# Altium PCB LED_TwoBars.PcbDoc
Units mm, origin at the board's own origin, x right, y up, seen from the top; angles counter-clockwise.
Board outline 152.4 x 101.6 mm, 2 copper layers (Top Layer, Bottom Layer); 31 components, 51 nets, 142 pads, 11 vias.
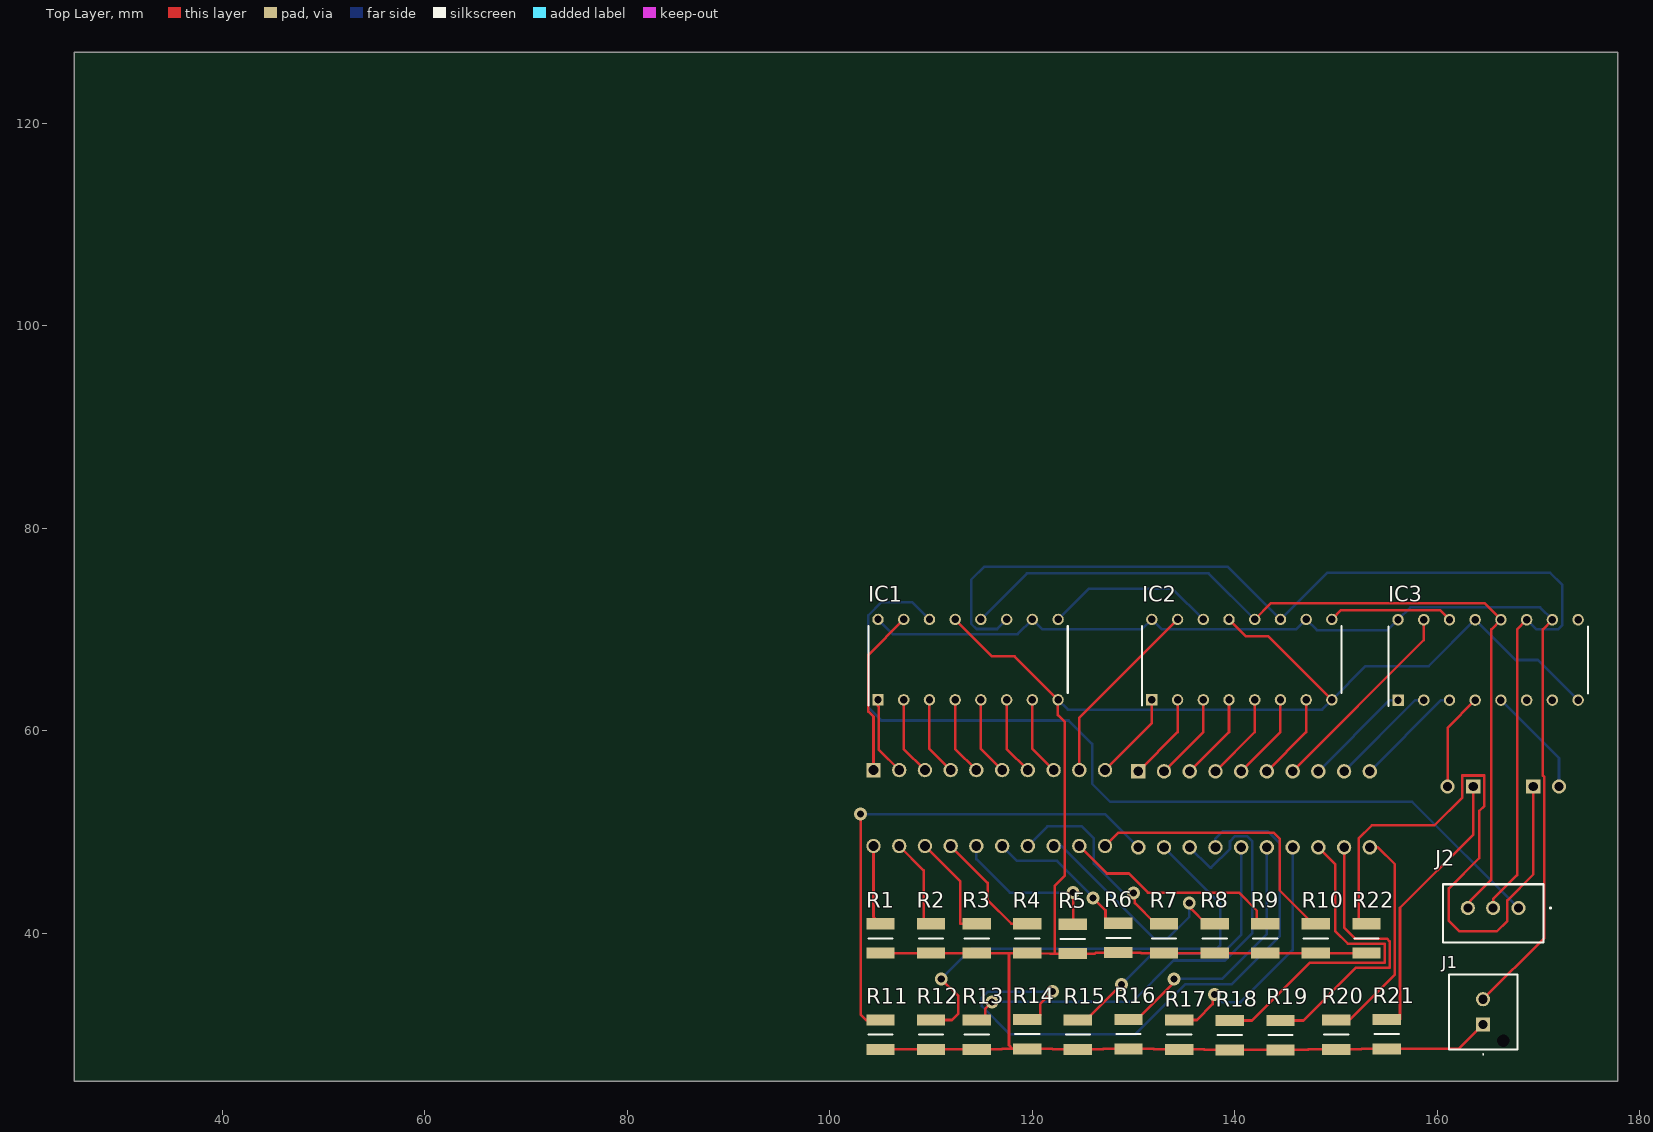
[diagram p0: Top Layer view]
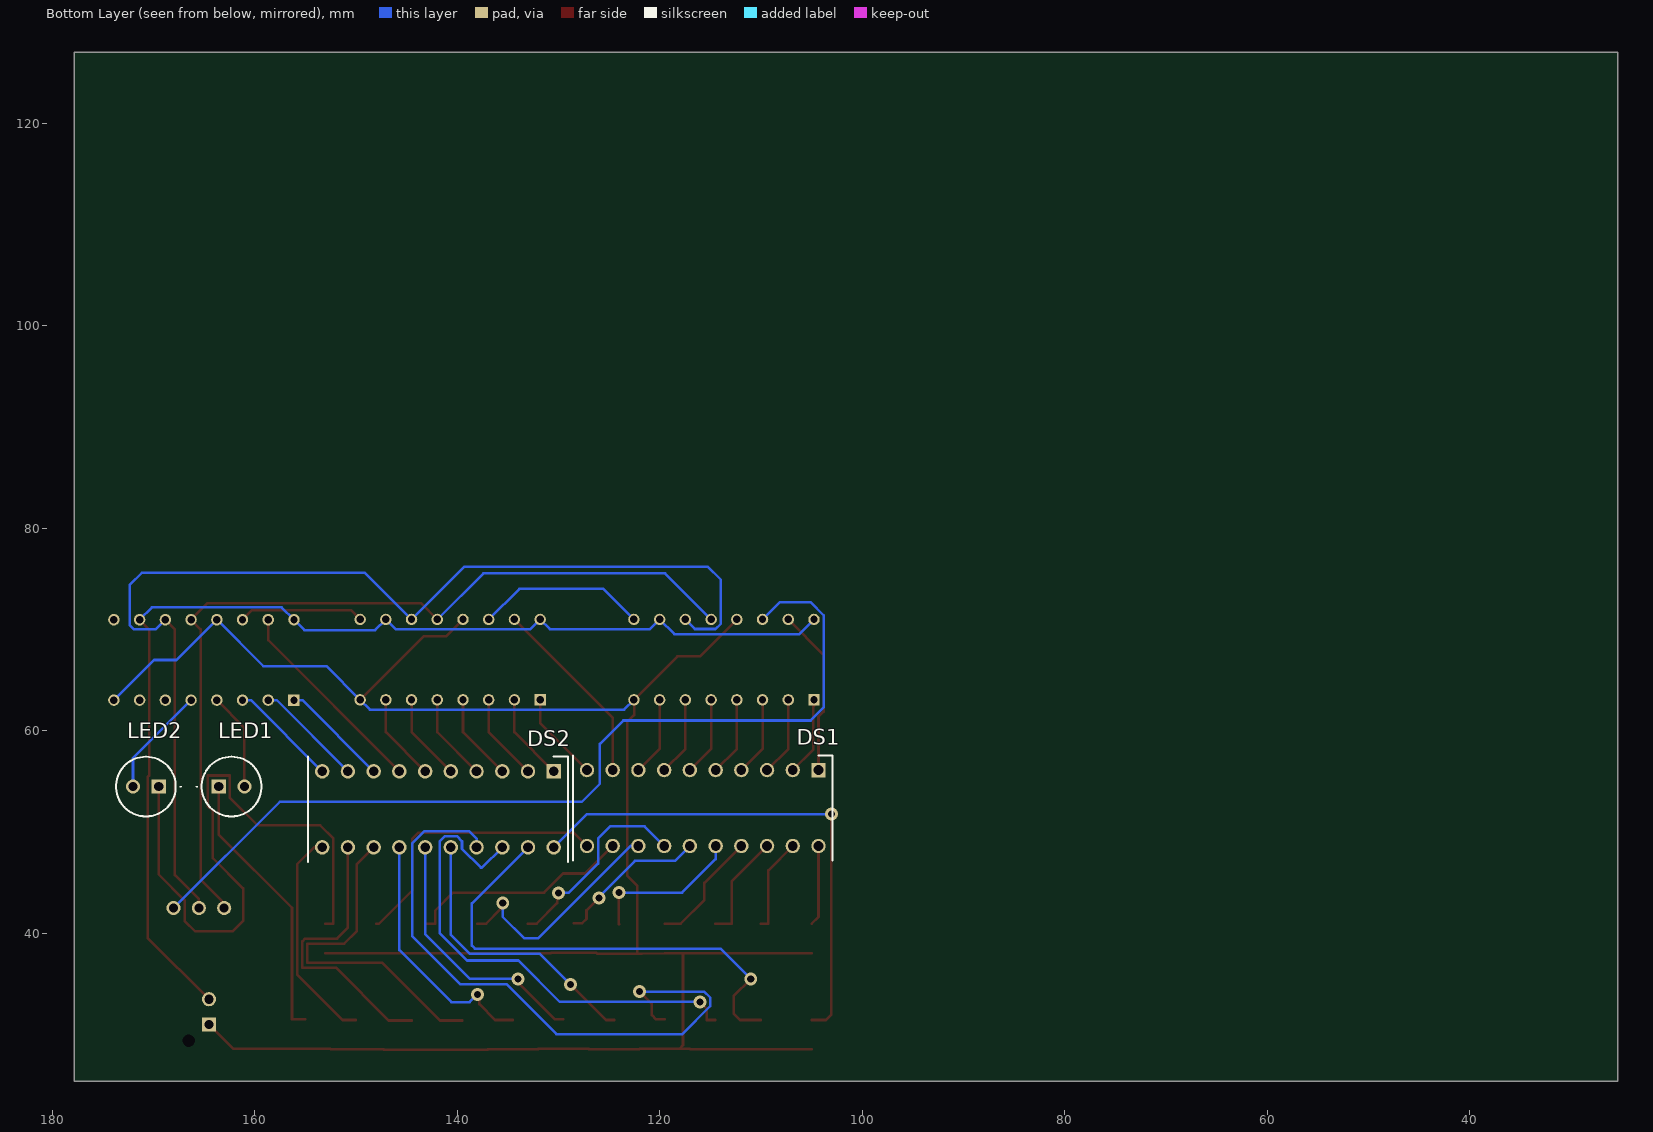
[diagram p1: Bottom Layer view, seen from below]
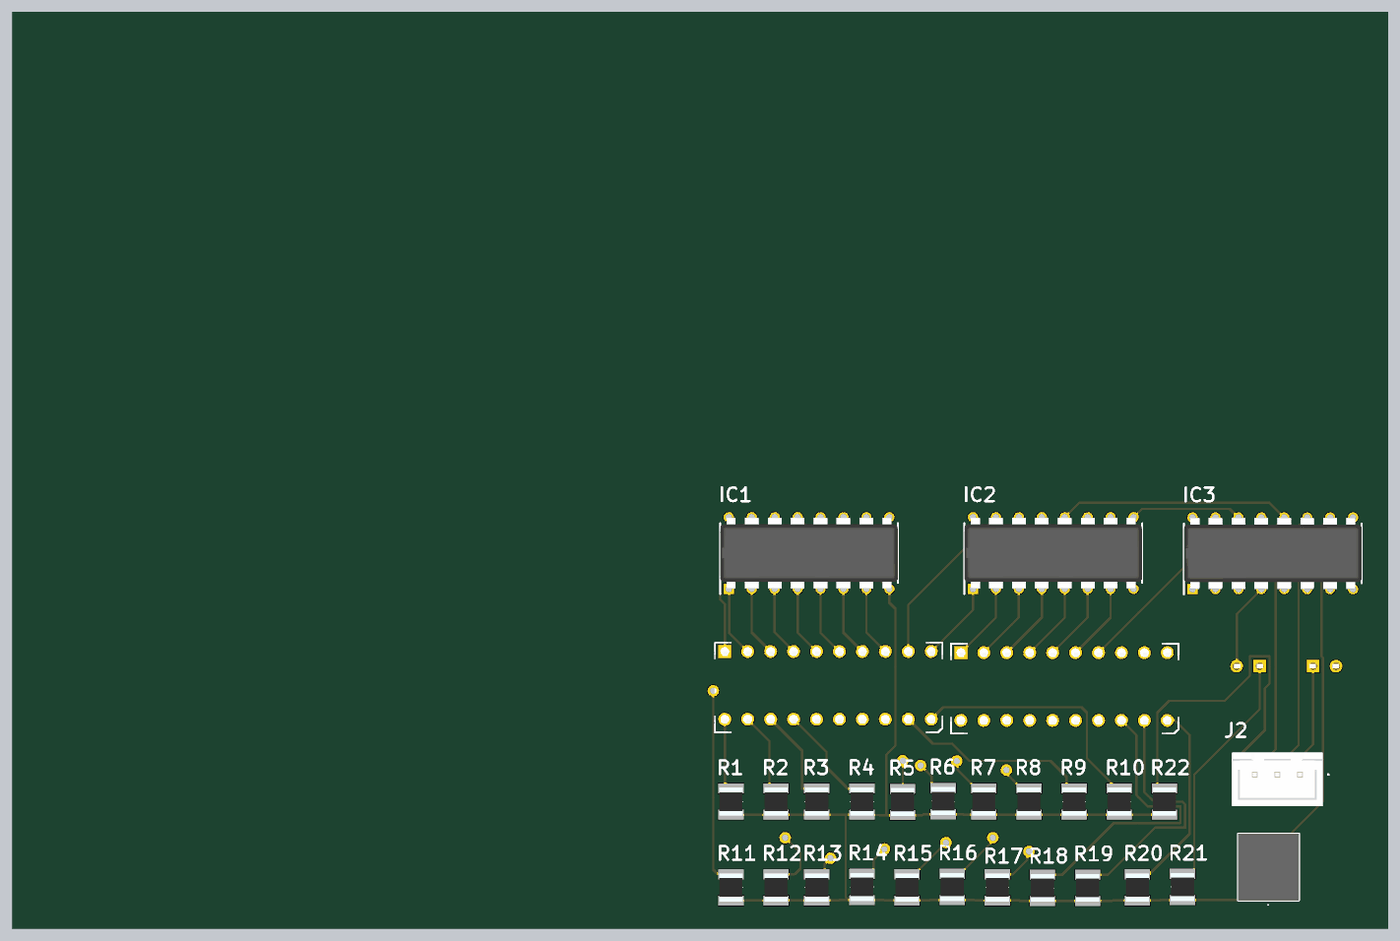
[diagram p2: 3D render of the assembled board from above, using the file's embedded part models]
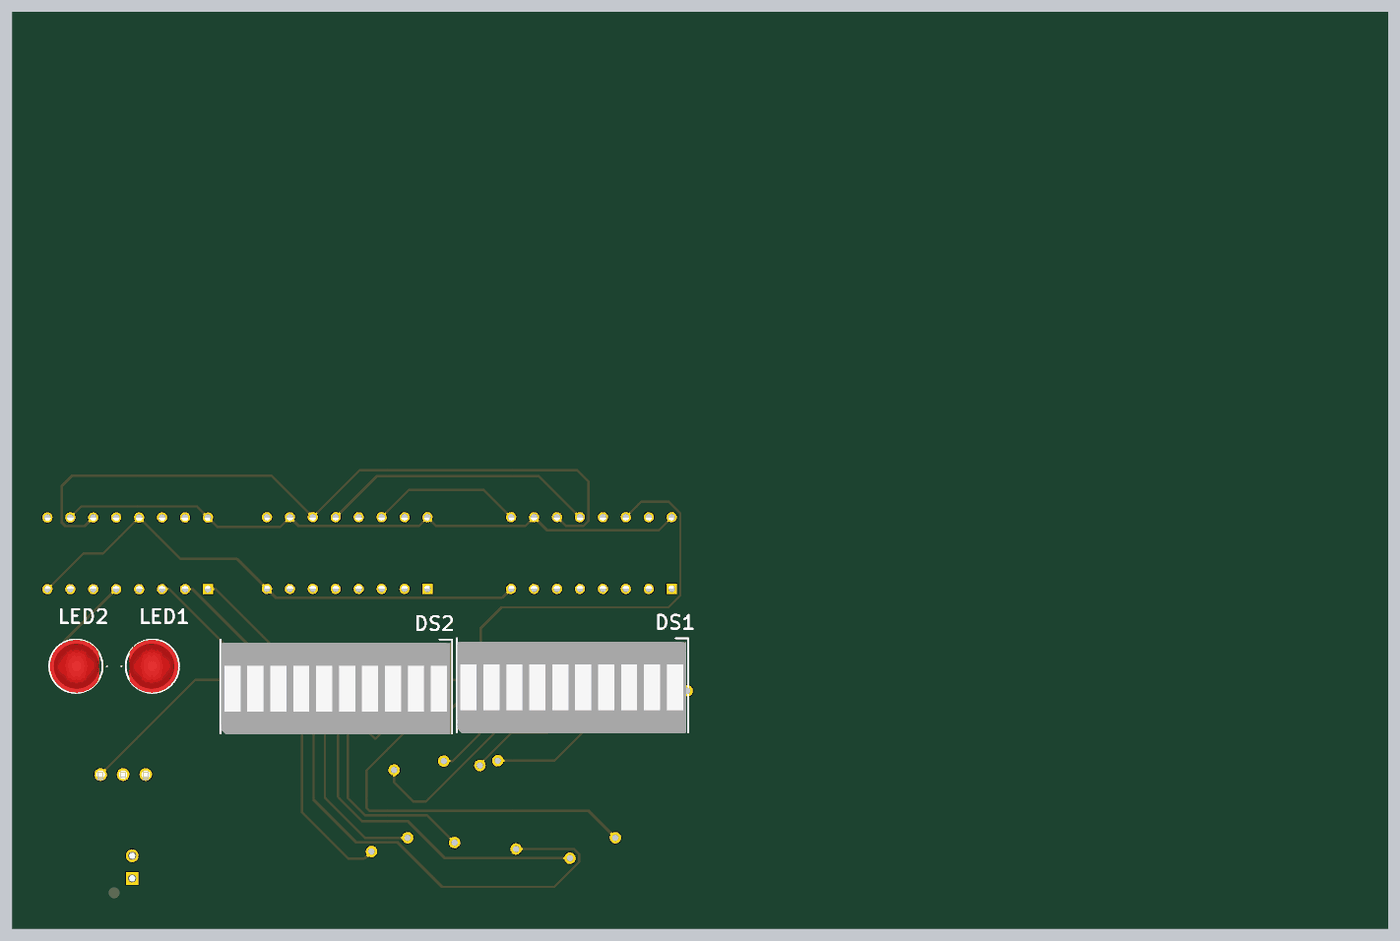
[diagram p3: 3D render of the assembled board from below, using the file's embedded part models]

## Layer stack, top to bottom
Top Solder: solder mask 0.0102, Solder Resist, Dk 3.5
Top Layer: signal copper 0.0356
Dielectric 1: dielectric 0.32, FR-4, Dk 4.8
Bottom Layer: signal copper 0.0356
Bottom Solder: solder mask 0.0102, Solder Resist, Dk 3.5

## Board outline
25.4,25.4 177.8,25.4 177.8,127 25.4,127

## Design rules (kind name [scope] priority, off if disabled: settings)
Clearance [All] p1: gap=0.254 ignorepadtopadclearanceinfootprint=FALSE
PolygonConnect [All] p1: connectstyle=Relief reliefconductorwidth=0.254 reliefentries=4 polygonreliefangle="90 Angle" airgapwidth=0.254
RoutingVias [All] p1: holewidth=0.711 width=1.27 viastyle="Through Hole" minholewidth=0.711 minwidth=1.27 maxholewidth=0.711 maxwidth=1.27
SolderMaskExpansion [All] p1: expansion=0.102 istentingtop=FALSE
SupplyNets "Schematic Supply Nets_1" [InNet('+5')] p1: voltage=0.000
SupplyNets "Schematic Supply Nets" [InNet('GND')] p2: voltage=0.000
Width [All] p1: maxlimit=0.254 minlimit=0.254 preferedwidth=0.254
30 further rules are at their usual default settings.

## Components (designator, comment, footprint, x,y, rotation, side; value= is the part's Value field where it differs from the comment)
DS1 "DC10GWA" DIPS750W75P254L2540H825Q20N 104.317,56.128 r270 bottom
DS2 "DC10GWA" DIPS750W75P254L2540H825Q20N 130.46,56 r270 bottom
IC1 "SN74HC595N" DIP794W53P254L1930H508Q16N 113.65,67.03 r90 top
IC2 "SN74HC595N" DIP794W53P254L1930H508Q16N 140.69,67.03 r90 top
IC3 "SN74HC595N" DIP794W53P254L1930H508Q16N 165,67 r90 top
J1 "BH2B-XH-2_LF__SN_" BH2BXH2LFSN 164.5,31 r270 top
J2 "B3B-XH-A_LF__SN_" B3BXHALFSN 168,42.5 r180 top
LED1 "WP7113ID5V" WP7113ID5V 163.54,54.5 r90 bottom
LED2 "WP7113ID5V" WP7113ID5V 169.46,54.5 r270 bottom
R1 "330" RESC3126X65N 105,39.5 r270 top
R2 "RC1210FR-07330RL" RESC3126X65N 110,39.5 r270 top
R3 "330" RESC3126X65N 114.5,39.5 r270 top
R4 "RC1210FR-07330RL" RESC3126X65N 119.5,39.5 r270 top
R5 "330" RESC3126X65N 124,39.45 r270 top
R6 "RC1210FR-07330RL" RESC3126X65N 128.5,39.55 r270 top
R7 "330" RESC3126X65N 133,39.5 r270 top
R8 "RC1210FR-07330RL" RESC3126X65N 138,39.5 r270 top
R9 "330" RESC3126X65N 143,39.5 r270 top
R10 "330" RESC3126X65N 148,39.5 r270 top
R11 "330" RESC3126X65N 105,30 r270 top
R12 "330" RESC3126X65N 110,30 r270 top
R13 "330" RESC3126X65N 114.5,30 r270 top
R14 "330" RESC3126X65N 119.5,30.05 r270 top
R15 "330" RESC3126X65N 124.5,30 r270 top
R16 "330" RESC3126X65N 129.5,30.05 r270 top
R17 "330" RESC3126X65N 134.5,30 r270 top
R18 "330" RESC3126X65N 139.5,29.95 r270 top
R19 "RC1210FR-07330RL" RESC3126X65N 144.5,29.95 r270 top
R20 "330" RESC3126X65N 150,30 r270 top
R21 "330" RESC3126X65N 155,30.05 r270 top
R22 "330" RESC3126X65N 153,39.5 r270 top

## Footprints (in the part's own frame and the unit in brackets; to place one, negate y for a bottom-side part, rotate by r counter-clockwise, add the part's x,y. Pads: shape width x height; smd on the part's side, far side on the other; paste and mask are expansions set on the pad)
B3BXHALFSN [mm]
  round 1.4 hole 0.9: 1(0,0) 2(2.5,0) 3(5,0)
  silkscreen extent -3.2,-2.35 7.45,3.4, body extent -2.45,-2.35 7.45,3.4, height 7.09
BH2BXH2LFSN [mm]
  rect 1.4x1.4 hole 0.9: 1(0,0)
  round 1.4 hole 0.9: 2(-2.5,0)
  round 0.6 hole 1.2 unplated: MH1(1.6,2)
  silkscreen extent -4.95,-3.35 3,3.4, body extent -4.95,-3.35 2.45,3.4, height 14.3
DIP794W53P254L1930H508Q16N [mm]
  rect 1.13x1.13 hole 0.73: 1(-3.97,8.89)
  round 1.13 hole 0.73: 2(-3.97,6.35) 3(-3.97,3.81) 4(-3.97,1.27) 5(-3.97,-1.27) 6(-3.97,-3.81) 7(-3.97,-6.35) 8(-3.97,-8.89) 9(3.97,-8.89) 10(3.97,-6.35) 11(3.97,-3.81) 12(3.97,-1.27) 13(3.97,1.27) 14(3.97,3.81) 15(3.97,6.35) 16(3.97,8.89)
  silkscreen extent -4.53,-9.84 3.3,9.84, body extent -3.94,-9.84 3.94,9.84, height 5.24
DIPS750W75P254L2540H825Q20N [mm]
  rect 1.425x1.425 hole 0.95: 1(0,0)
  round 1.425 hole 0.95: 2(0,-2.54) 3(0,-5.08) 4(0,-7.62) 5(0,-10.16) 6(0,-12.7) 7(0,-15.24) 8(0,-17.78) 9(0,-20.32) 10(0,-22.86) 11(7.5,-22.86) 12(7.5,-20.32) 13(7.5,-17.78) 14(7.5,-15.24) 15(7.5,-12.7) 16(7.5,-10.16) 17(7.5,-7.62) 18(7.5,-5.08) 19(7.5,-2.54) 20(7.5,0)
  silkscreen extent -1.46,-24.26 8.95,1.4, body extent -1.1,-24.21 9.06,1.19, height 6.29
RESC3126X65N [mm]
  rect 1.1x2.8 smd: 1(-1.45,0) 2(1.45,0)
  silkscreen extent 0,-1.2 0,1.2, body extent -1.55,-1.3 1.55,1.3, height 0.65
WP7113ID5V [mm]
  rect 1.4x1.4 hole 0.9: 1(0,0)
  round 1.4 hole 0.9: 2(0,-2.54)
  silkscreen extent -2.95,-4.22 2.95,2.2, body extent -2.95,-4.15 2.95,1.28, height 15.17

## Part data
DS1 DS2: "Display", Manufacturer_Name=Kingbright, Mouser Part Number=604-DC10GWA, Datasheet Link=http://www.us.kingbright.com/images/catalog/SPEC/DC10GWA.pdf, Height=8.25mm, Manufacturer_Part_Number=DC10GWA, Mouser Price/Stock=https://www.mouser.co.uk/ProductDetail/Kingbright/DC10GWA?qs=E09Sz5t5voWFSEBebdyzXA%3D%3D
IC1 IC2 IC3: "Integrated Circuit", Manufacturer_Name="Texas Instruments", Mouser Part Number=595-SN74HC595N, Arrow Part Number=SN74HC595N, Arrow Price/Stock=https://www.arrow.com/en/products/sn74hc595n/texas-instruments?utm_currency=USD&region=nac, Datasheet Link=http://www.ti.com/lit/ds/symlink/sn74hc595.pdf, Height=5.08mm, Manufacturer_Part_Number=SN74HC595N, Mouser Price/Stock=https://www.mouser.co.uk/ProductDetail/Texas-Instruments/SN74HC595N?qs=IEl3ej0IqwBTHkYa8XPoMQ%3D%3D
J1: "Connector", Arrow Part Number=BH2B-XH-2(LF)(SN), Manufacturer_Name="JST (JAPAN SOLDERLESS TERMINALS)", Arrow Price/Stock=https://www.arrow.com/en/products/bh2b-xh-2-lf-sn/jst-manufacturing?region=europe, Datasheet Link=https://www.jst-mfg.com/product/pdf/eng/eXH-H.pdf, Height=14.2mm, Manufacturer_Part_Number=BH2B-XH-2(LF)(SN)
J2: "Connector", Arrow Part Number=B3B-XH-A(LF)(SN), Manufacturer_Name="JST (JAPAN SOLDERLESS TERMINALS)", Mouser Part Number=306-B3BXHALFSNP, Arrow Price/Stock=https://www.arrow.com/en/products/b3b-xh-a-lf-sn/jst-manufacturing?utm_currency=USD&region=europe, Datasheet Link=https://datasheet.lcsc.com/szlcsc/1812131720_JST-Sales-America-B3B-XH-A-LF-SN_C144394.pdf, Height=7mm, Manufacturer_Part_Number=B3B-XH-A(LF)(SN), Mouser Price/Stock=https://www.mouser.co.uk/ProductDetail/JST-Commercial/B3B-XH-ALFSN?qs=cdbOS8ANM9BVkoboCCIEMQ%3D%3D
LED1 LED2: "LED", Manufacturer_Name=Kingbright, Mouser Part Number=604-WP7113ID5V, Arrow Part Number=WP7113ID5V, Arrow Price/Stock=https://www.arrow.com/en/products/wp7113id5v/kingbright?utm_currency=USD&region=nac, Datasheet Link=https://www.kingbrightusa.com/images/catalog/SPEC/WP7113ID5V.pdf, Height=9.85mm, Manufacturer_Part_Number=WP7113ID5V, Mouser Price/Stock=https://www.mouser.co.uk/ProductDetail/Kingbright/WP7113ID5V?qs=58z0TXQGVSQgkIxR0kd%2F5Q%3D%3D
R1 R3 R5 R7 R9 R10 R11 R12 R13 R14 R15 R16 R17 R18 R20 R21 R22: library part RC1210FR-07330RL, "Resistor", Manufacturer_Name="Yageo Group", Datasheet Link=https://www.yageogroup.com/content/datasheet/asset/file/PYU-RC_GROUP_51_ROHS_L, Height=0.65mm, Manufacturer_Part_Number=RC1210FR-07330RL
R2 R4 R6 R8 R19: "Resistor", Manufacturer_Name="Yageo Group", Datasheet Link=https://www.yageogroup.com/content/datasheet/asset/file/PYU-RC_GROUP_51_ROHS_L, Height=0.65mm, Manufacturer_Part_Number=RC1210FR-07330RL

## Via types
v1: diameter 1.27, hole 0.711, Top Layer to Bottom Layer, 11 vias

## Nets (pads, with @x,y where several pads share a name; then routed paths per layer and width w, separated by ;. In a path a pad name is that pad's centre, name@x,y a point inside that pad or via, vN(x,y) a via of type N, cw(c..) or ccw(c..) an arc to the next point about the centre after c; other vN are vias at no path point)
+5: IC1.10 IC1.16 IC2.10 IC2.16 IC3.10 IC3.16 J1.2 | length 111.7
  Top Layer w0.254: J1.2 170.556,39.556 170.556,55.435 170.403,55.587 170.403,70.023 IC3.10
  Bottom Layer w0.254: IC1.16 106.214,69.546 118.546,69.546 IC1.10 120.96,70.04 130.84,70.04 IC2.16 132.76,70.04 146.08,70.04 IC2.10 148.102,69.938 155.078,69.938 IC3.16 157.329,72.189 170.131,72.189 IC3.10
GND: IC1.8 IC1.13 IC2.8 IC2.13 IC3.8 IC3.13 J1.1 R1.2 R2.2 R3.2 R4.2 R5.2 R6.2 R7.2 R8.2 R9.2 R10.2 R11.2 R12.2 R13.2 R14.2 R15.2 R16.2 R17.2 R18.2 R19.2 R20.2 R21.2 R22.2 | length 229.7
  Top Layer w0.254: R11.2 R12.2 R13.2 116.962,28.55 117.012,28.6 118.054,28.6 ; R1.2 R2.2 R3.2 117.724,38.05 ; IC1.13 116.033,67.347 118.253,67.347 IC1.8 122.524,63.06 122.524,61.556 123.21,60.87 123.21,45.706 122.194,44.69 122.194,38 ; IC2.13 141.066,69.354 143.286,69.354 IC2.8 ; R22.2 R10.2 R9.2 R8.2 R7.2 130.753,38.05 130.703,38.1 R6.2 126.282,38.1 126.182,38 R5.2 122.194,38 ; J1.1 162.1,28.6 R21.2 152.521,28.6 152.471,28.55 R20.2 147.263,28.55 147.213,28.5 R19.2 R18.2 137.002,28.5 136.952,28.55 R17.2 132.023,28.55 131.973,28.6 R16.2 127.019,28.6 126.969,28.55 R15.2 122.016,28.55 121.966,28.6 R14.2 118.054,28.6 ; 117.724,38.05 117.698,38.025 117.698,28.956 118.054,28.6 ; 117.724,38.05 R4.2 121.762,38 122.194,38
  Bottom Layer w0.254: IC1.8 123.511,62.089 148.609,62.089 IC2.8 152.902,66.382 159.142,66.382 IC3.13 167.708,66.992 169.928,66.992 IC3.8
MCU_Clock: IC1.11 IC2.11 IC3.11 J2.2 | length 109.8
  Top Layer w0.254: J2.2 165.5,43.397 167.863,45.76 167.863,70.023 IC3.11
  Bottom Layer w0.254: IC1.11 116.514,70.054 114.484,70.054 113.965,70.573 113.965,74.916 115.26,76.212 139.288,76.212 IC2.11 149.102,75.602 171.14,75.602 172.308,74.434 172.308,70.421 171.902,70.014 169.766,70.014 IC3.11
MCU_Data: IC1.14 J2.1 | length 91.1
  Bottom Layer w0.254: IC1.14 108.133,72.707 105.1,72.707 103.805,71.411 103.805,62.318 105.1,61.023 123.591,61.023 125.903,58.711 125.903,54.774 127.681,52.996 157.504,52.996 J2.1
MCU_Latch: IC1.12 IC2.12 IC3.12 J2.3 | length 86.3
  Top Layer w0.254: IC2.12 143.565,72.605 164.635,72.605 IC3.12 165.323,70.023 165.323,45.323 163.219,43.219 163.219,42.719 J2.3
  Bottom Layer w0.254: IC1.12 119.471,75.551 137.409,75.551 IC2.12
NetDS1_11: DS1.11 R10.1 | length 28.1
  Top Layer w0.254: DS1.11 128.497,49.948 143.835,49.948 144.419,49.364 144.419,44.259 147.728,40.95 R10.1
NetDS1_12: DS1.12 R9.1 | length 22.3
  Top Layer w0.254: DS1.12 127.352,45.912 129.525,45.912 131.421,44.016 140.395,44.016 142.159,42.252 142.159,40.95 R9.1
NetDS1_13: DS1.13 R8.1 | length 23
  Top Layer w0.254: v1(135.5,43) 135.694,42.806 135.694,42.406 137.15,40.95 R8.1
  Bottom Layer w0.254: DS1.13 122.88,48.628 131.999,39.509 133.366,39.509 135.5,41.642 v1(135.5,43)
NetDS1_14: DS1.14 R7.1 | length 20.2
  Top Layer w0.254: v1(130,44) 130.116,43.884 130.116,42.984 132.15,40.95 R7.1
  Bottom Layer w0.254: DS1.14 121.487,50.558 124.887,50.558 126.08,49.364 126.08,46.9 128.981,44 v1(130,44)
NetDS1_15: DS1.15 R6.1 | length 15.2
  Top Layer w0.254: v1(126,43.5) 127.227,42.273 127.227,41.423 127.65,41 R6.1
  Bottom Layer w0.254: DS1.15 118.49,47.154 122.448,47.154 126,43.602 v1(126,43.5)
NetDS1_16: DS1.16 R5.1 | length 15.4
  Top Layer w0.254: R5.1 124.023,40.9 v1(124.023,44.03)
  Bottom Layer w0.254: DS1.16 114.477,47.332 117.779,44.03 v1(124.023,44.03)
NetDS1_17: DS1.17 R4.1 | length 11.7
  Top Layer w0.254: DS1.17 115.59,44.974 115.59,43.287 117.927,40.95 R4.1
NetDS1_18: DS1.18 R3.1 | length 10.7
  Top Layer w0.254: DS1.18 112.872,45.152 112.872,40.95 R3.1
NetDS1_19: DS1.19 R2.1 | length 9.4
  Top Layer w0.254: DS1.19 109.266,46.219 109.266,40.95 R2.1
NetDS1_20: DS1.20 R1.1 | length 8
  Top Layer w0.254: DS1.20 104.317,41.633 R1.1
NetDS2_11: DS2.11 R20.1 | length 21.7
  Top Layer w0.254: R20.1 151.312,31.45 155.797,35.935 155.797,46.825 154.122,48.5 DS2.11
NetDS2_12: DS2.12 R19.1 | length 28.5
  Top Layer w0.254: R19.1 146.756,31.4 151.967,36.611 155.289,36.611 155.289,39.204 155.004,39.489 151.858,39.489 150.78,40.567 DS2.12
NetDS2_13: DS2.13 R18.1 | length 33.9
  Top Layer w0.254: R18.1 141.676,31.4 147.395,37.119 154.781,37.119 154.781,38.981 151.145,38.981 149.906,40.22 149.906,46.834 DS2.13
NetDS2_14: DS2.14 R17.1 | length 25.3
  Top Layer w0.254: R17.1 136.24,31.45 137.806,33.015 137.806,33.782 v1(138,33.976)
  Bottom Layer w0.254: v1(138,33.976) 138.773,33.203 140.553,33.203 145.7,38.349 DS2.14
NetDS2_15: DS2.15 R16.1 | length 25.9
  Top Layer w0.254: R16.1 130.35,31.5 133.806,34.956 133.806,35.306 v1(134,35.5)
  Bottom Layer w0.254: v1(134,35.5) 138.734,35.5 143.16,39.926 DS2.15
NetDS2_16: DS2.16 R15.1 | length 28.2
  Top Layer w0.254: R15.1 125.293,31.45 v1(128.805,34.962)
  Bottom Layer w0.254: v1(128.805,34.962) 131.828,37.985 138.75,37.985 140.62,39.855 DS2.16
NetDS2_17: DS2.17 R14.1 | length 64.1
  Top Layer w0.254: R14.1 120.35,31.5 120.773,31.923 120.773,33.024 v1(122,34.251)
  Bottom Layer w0.254: v1(122,34.251) 115.601,34.251 115.006,33.656 115.006,32.814 117.76,30.06 130.195,30.06 135.127,34.992 139.701,34.992 144.419,39.71 144.419,48.907 143.224,50.102 138.817,50.102 138.08,49.364 DS2.17
NetDS2_18: DS2.18 R13.1 | length 49.4
  Top Layer w0.254: R13.1 115.362,31.45 115.362,32.575 v1(116.022,33.235)
  Bottom Layer w0.254: v1(116.022,33.235) 129.865,33.235 133.954,37.324 139.009,37.324 141.727,40.042 141.727,49.059 141.192,49.594 140.026,49.594 139.517,49.085 139.517,48.348 137.652,46.483 137.557,46.483 DS2.18
NetDS2_19: DS2.19 R12.1 | length 48
  Top Layer w0.254: R12.1 112.053,31.45 112.695,32.092 112.695,33.805 v1(111,35.5)
  Bottom Layer w0.254: v1(111,35.5) 113.993,38.493 138.247,38.493 138.552,38.798 138.552,42.948 DS2.19
NetDS2_20: DS2.20 R11.1 | length 50.7
  Top Layer w0.254: v1(103.043,51.777) 103.043,31.983 103.576,31.45 R11.1
  Bottom Layer w0.254: v1(103.043,51.777) 127.183,51.777 DS2.20
NetIC1_9: IC1.9 IC2.14 | length 16.8
  Bottom Layer w0.254: IC1.9 125.567,74.027 133.853,74.027 IC2.14
NetIC2_9: IC2.9 IC3.14 | length 12.4
  Top Layer w0.254: IC2.9 150.499,71.919 160.241,71.919 IC3.14
NetLED1_1: LED1.1 R21.1 | length 27.3
  Top Layer w0.254: R21.1 156.305,31.5 156.305,42.53 163.54,49.765 LED1.1
NetLED2_1: LED2.1 R22.1 | length 62.2
  Top Layer w0.254: R22.1 152.217,40.95 152.217,49.364 153.512,50.659 159.685,50.659 162.453,53.428 162.453,55.587 164.638,55.587 164.638,52.59 164.13,52.082 164.13,47.434 161.132,44.436 161.132,41.236 162.174,40.195 165.857,40.195 166.898,41.236 166.898,43.268 169.46,45.83 LED2.1
sr1_1: DS1.1 IC1.15 | length 16.5
  Top Layer w0.254: DS1.1 104.317,61.4 103.805,61.912 103.805,67.505 IC1.15
sr1_2: DS1.2 IC1.1 | length 7.8
  Top Layer w0.254: IC1.1 104.76,62.487 104.825,62.422 104.825,58.16 DS1.2
sr1_3: DS1.3 IC1.2 | length 7.8
  Top Layer w0.254: IC1.2 107.3,58.225 DS1.3
sr1_4: DS1.4 IC1.3 | length 7.8
  Top Layer w0.254: IC1.3 109.84,58.225 DS1.4
sr1_5: DS1.5 IC1.4 | length 7.8
  Top Layer w0.254: IC1.4 112.38,58.225 DS1.5
sr1_6: DS1.6 IC1.5 | length 7.8
  Top Layer w0.254: IC1.5 114.92,58.225 DS1.6
sr1_7: DS1.7 IC1.6 | length 7.8
  Top Layer w0.254: IC1.6 117.46,58.225 DS1.7
sr1_8: DS1.8 IC1.7 | length 7.8
  Top Layer w0.254: IC1.7 120,58.225 DS1.8
sr2_1: DS1.9 IC2.15 | length 18.9
  Top Layer w0.254: DS1.9 124.637,61.297 IC2.15
sr2_2: DS1.10 IC2.1 | length 8.8
  Top Layer w0.254: DS1.10 131.8,60.751 IC2.1
sr2_3: DS2.1 IC2.2 | length 8.7
  Top Layer w0.254: DS2.1 134.34,59.88 IC2.2
sr2_4: DS2.2 IC2.3 | length 8.7
  Top Layer w0.254: DS2.2 136.88,59.88 IC2.3
sr2_5: DS2.3 IC2.4 | length 8.7
  Top Layer w0.254: DS2.3 139.42,59.88 IC2.4
sr2_6: DS2.4 IC2.5 | length 8.7
  Top Layer w0.254: DS2.4 141.96,59.88 IC2.5
sr2_7: DS2.5 IC2.6 | length 8.7
  Top Layer w0.254: DS2.5 144.5,59.88 IC2.6
sr2_8: DS2.6 IC2.7 | length 8.7
  Top Layer w0.254: DS2.6 147.04,59.88 IC2.7
sr3_1: DS2.7 IC3.15 | length 20.3
  Top Layer w0.254: DS2.7 158.65,68.95 IC3.15
sr3_2: DS2.8 IC3.1 | length 10.8
  Bottom Layer w0.254: DS2.8 155.27,63.03 IC3.1
sr3_3: DS2.9 IC3.2 | length 10.8
  Bottom Layer w0.254: DS2.9 157.81,63.03 IC3.2
sr3_4: DS2.10 IC3.3 | length 10.8
  Bottom Layer w0.254: DS2.10 160.35,63.03 IC3.3
sr3_5: IC3.4 LED1.2 | length 9.7
  Top Layer w0.254: LED1.2 161,60.3 IC3.4
sr3_6: IC3.5 LED2.2 | length 10.9
  Bottom Layer w0.254: IC3.5 172,57.3 LED2.2
pads on no net: IC3.6 IC3.7 IC3.9 J1.MH1